# Altium PCB RF Frontend v1.0.PcbDoc
Units mil, origin at the board's own origin, x right, y up, seen from the top; angles counter-clockwise.
Board outline 1975 x 1250 mil, 4 copper layers (Top Layer, Signal Layer 1, Signal Layer 2, Bottom Layer), stack 30.634 mil thick; 54 components, 39 nets, 191 pads, 88 vias.
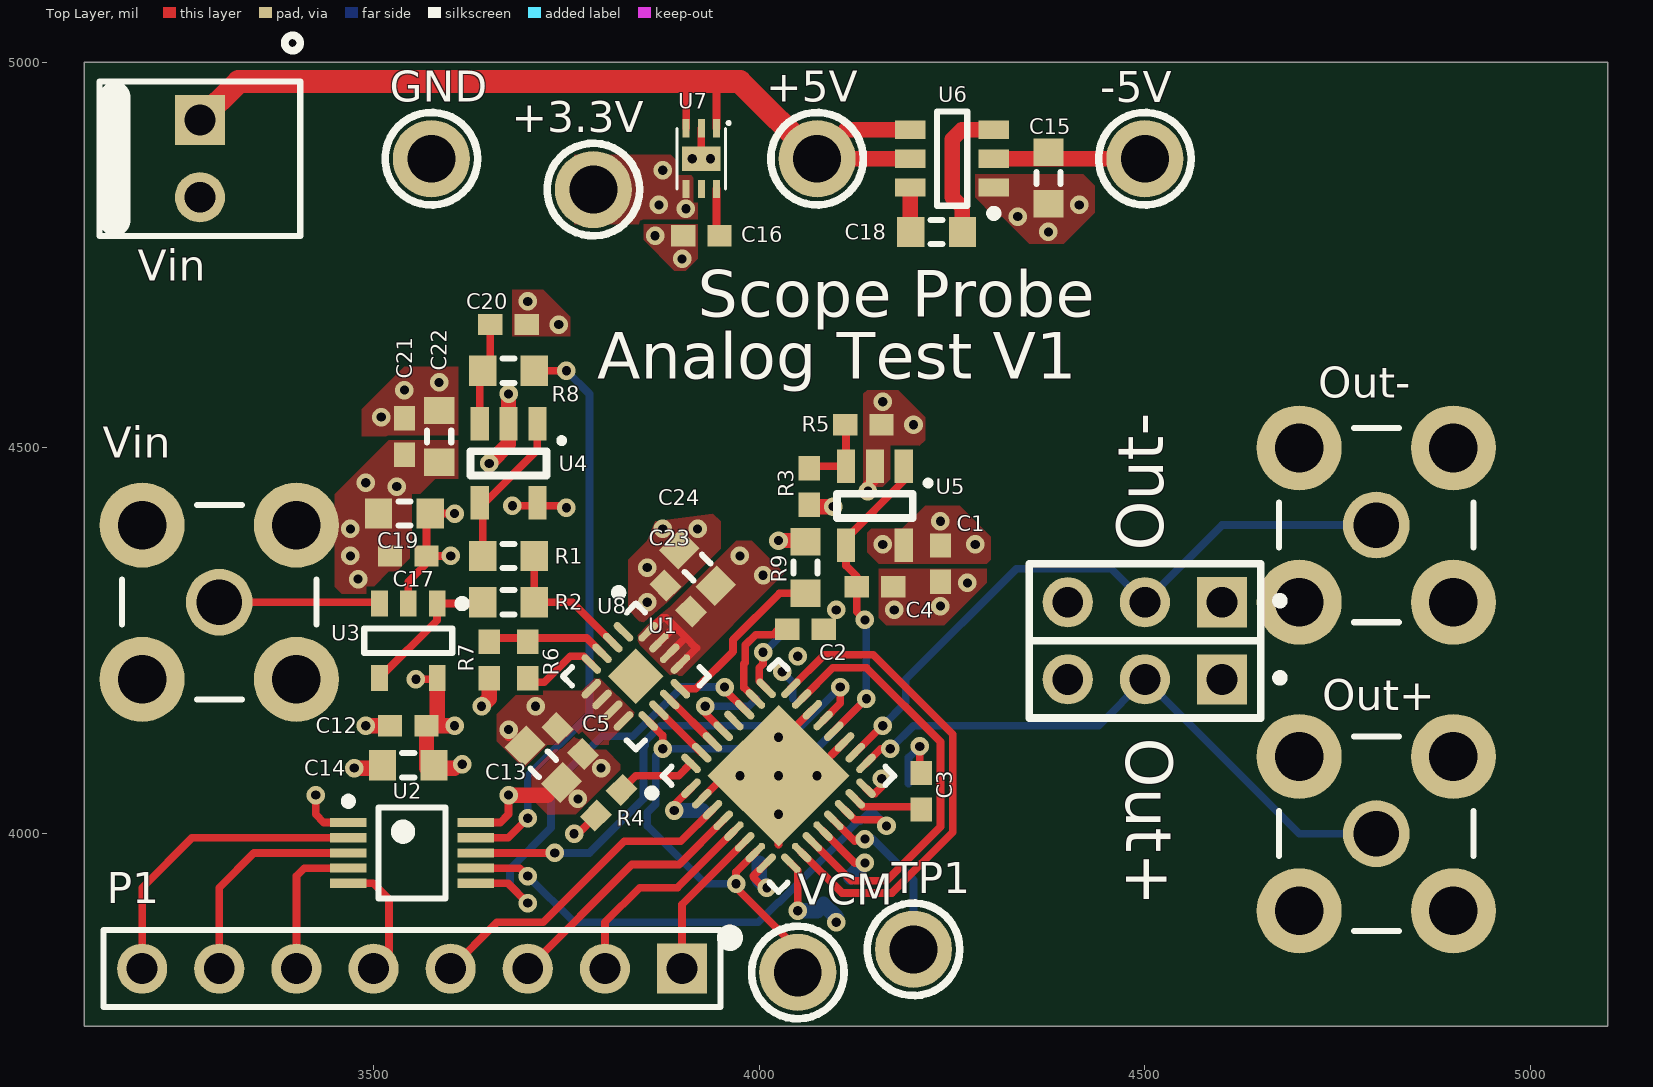
[diagram p0: Top Layer view]
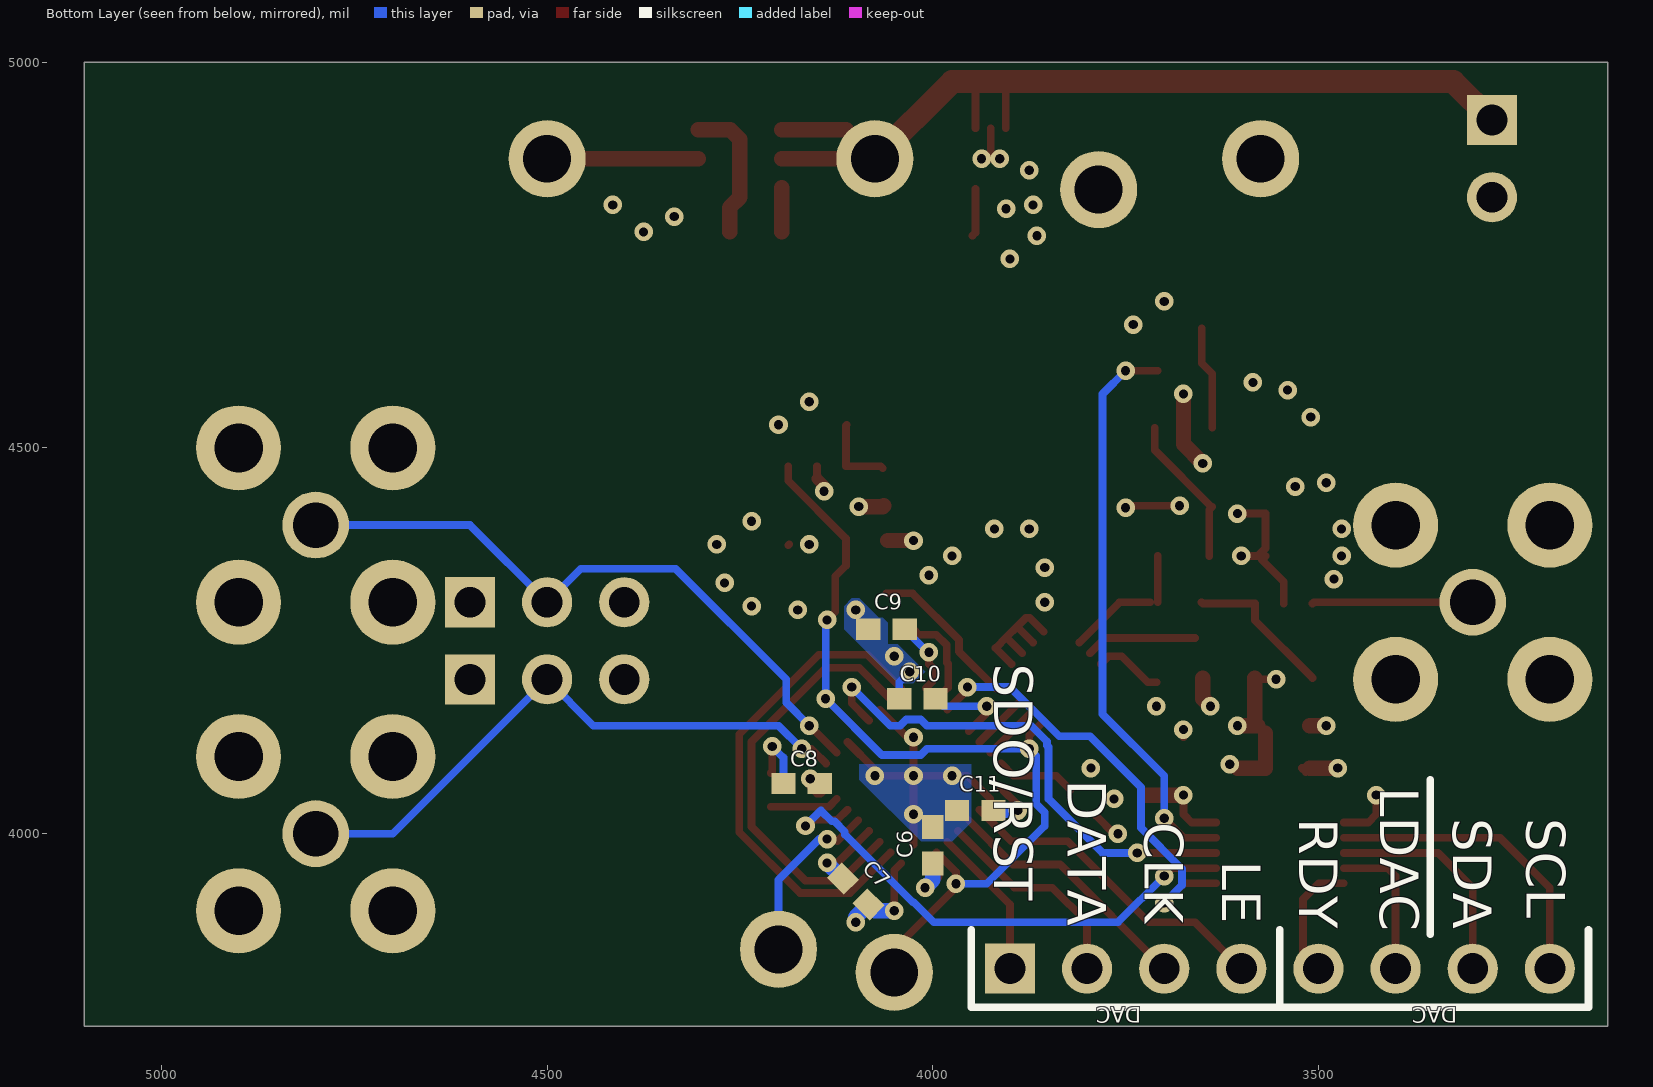
[diagram p1: Bottom Layer view, seen from below]
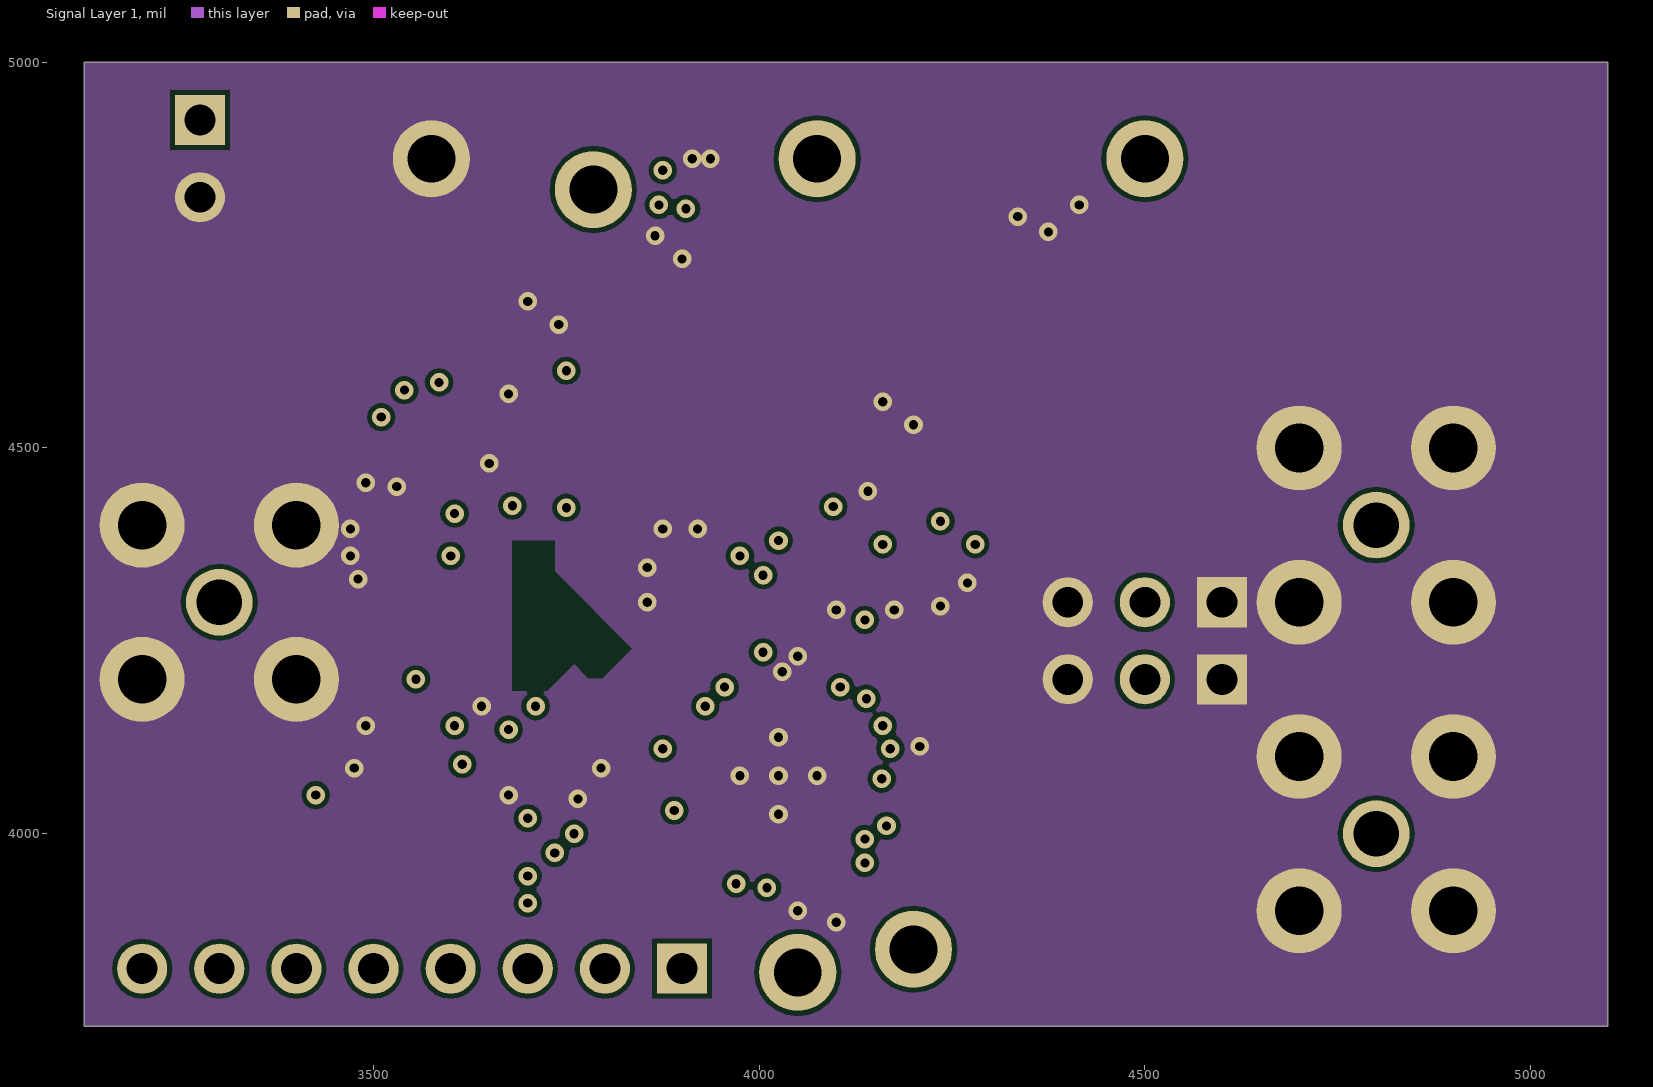
[diagram p2: Signal Layer 1]
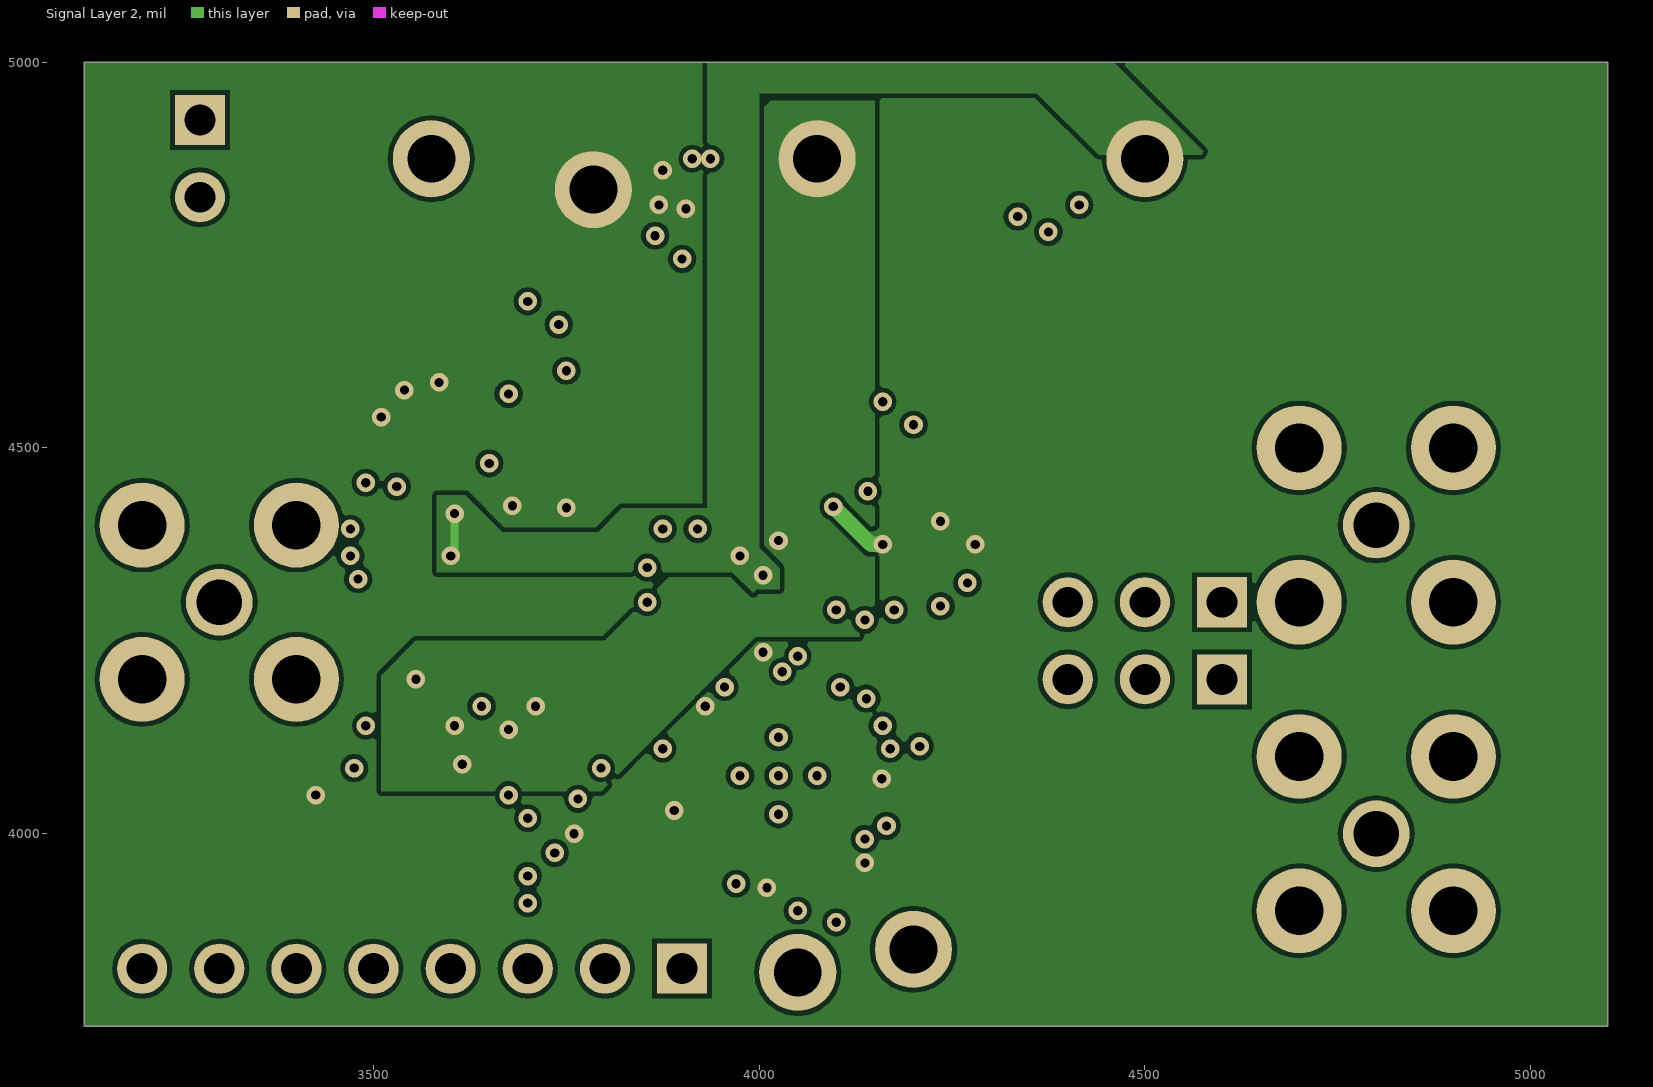
[diagram p3: Signal Layer 2]

## Layer stack, top to bottom
Top Solder: solder mask 0.4, Solder Resist, Dk 3.5
Top Layer: signal copper 1.4
Dielectric 1: core 10, FR-4, Dk 4.2
Signal Layer 1: signal copper 1.417
Dielectric 3: prepreg 5, Dk 4.2
Signal Layer 2: signal copper 1.417
Dielectric 2: core 10, Dk 4.2
Bottom Layer: signal copper 1.4
Bottom Solder: solder mask 0.4, Solder Resist, Dk 3.5

## Board outline
3125,3750 3125,5000 5100,5000 5100,3750

## Design rules (kind name [scope] priority, off if disabled: settings)
Clearance [All] p1: gap=6 ignorepadtopadclearanceinfootprint=FALSE
MinimumSolderMaskSliver [All] p1: minsoldermaskwidth=2
PlaneConnect [All] p1: planeconnectstyle=Direct reliefexpansion=20 reliefentries=4 reliefconductorwidth=10 reliefairgap=10
PolygonConnect [All] p1: connectstyle=Direct reliefconductorwidth=10 reliefentries=4 polygonreliefangle="90 Angle" airgapwidth=10
RoutingVias [All] p1: holewidth=12 width=24 viastyle="Through Hole" minholewidth=12 minwidth=24 maxholewidth=50 maxwidth=100
SolderMaskExpansion [All] p1: expansion=4
Width [All] p1: maxlimit=100 minlimit=6 preferedwidth=6
28 further rules are at their usual default settings.

## Classes and differential pairs
component class "EF Frontend": +3.3V +5V -5V C1 C2 C3 C4 C5 C6 C7 C8 C9 C10 C11 C12 C13 C14 C15 C16 C17 C18 C19 C20 C21 C22 C23 C24 GND Out+ Out- P1 R1 R2 R3 R4 R5 R6 R7 R8 R9 TP1 U1 U2 U3 U4 U5 U6 U7 U8 VCM Vin

## Components (designator, comment, footprint, x,y, rotation, side; value= is the part's Value field where it differs from the comment)
+3.3V "TP" TESTPOINT062 3785,4835 r90 top
+5V "TP" TESTPOINT062 4075,4875 r0 top
-5V "TP" TESTPOINT062 4500,4875 r0 top
C1 "Cap" 0402(1005) 4235,4350 r90 top value=0.1uF
C2 "Cap" 0402(1005) 4060,4265 r180 top value=0.1uF
C3 "Cap" 0402(1005) 4210,4055 r270 top value=0.1uF
C4 "Cap" 0402(1005) 4150,4320 r180 top value=0.1uF
C5 "Cap" 0402(1005) 3755,4120 r135 top value=0.1uF
C6 "Cap" 0402(1005) 4000,3985 r270 bottom value=0.1uF
C7 "Cap" 0402(1005) 4100,3925 r45 bottom value=0.1uF
C8 "Cap" 0402(1005) 4170,4065 r180 bottom value=0.1uF
C9 "Cap" 0402(1005) 4060,4265 r180 bottom value=0.1uF
C10 "Cap" 0402(1005) 4020,4175 r180 bottom value=0.1uF
C11 "Cap" 0402(1005) 3945,4030 r180 bottom value=0.1uF
C12 "Cap" 0402(1005) 3545,4140 r0 top value=0.1uF
C13 "25V" 0603(1608) 3720,4090 r135 top value=10uF
C14 "25V" 0603(1608) 3545,4088.53 r0 top value=10uF
C15 "25V" 0603(1608) 4375,4850 r90 top value=10uF
C16 "Cap" 0402(1005) 3925,4775 r0 top value=0.1uF
C17 "Cap" 0402(1005) 3545,4360 r0 top value=0.1uF
C18 "25V" 0603(1608) 4230,4780 r0 top value=10uF
C19 "25V" 0603(1608) 3540,4415 r0 top value=10uF
C20 "Cap" 0402(1005) 3675,4660 r180 top value=0.1uF
C21 "Cap" 0402(1005) 3540,4515 r90 top value=0.1uF
C22 "25V" 0603(1608) 3585,4515 r90 top value=10uF
C23 "Cap" 0402(1005) 3895,4305 r315 top value=0.1uF
C24 "25V" 0603(1608) 3920,4345 r315 top value=10uF
GND "TP" TESTPOINT062 3575,4875 r0 top
Out+ "SMA" "TE SMA Stright" 4800,4000 r0 top
Out+ "0.1\"" 0.1HDR1X3 4600,4200 r180 top
Out- "SMA" "TE SMA Stright" 4800,4400 r0 top
Out- "0.1\"" 0.1HDR1X3 4600,4300 r180 top
P1 "0.1\" Vert" 0.1HDR1X8 3900,3825 r180 top
R1 "Res1" 0603(1608) 3675,4360 r0 top value=10.0k
R2 "Res1" 0603(1608) 3675,4300 r0 top value=10.0k
R3 "Res1" 0402(1005) 4065,4450 r270 top value=10k
R4 "Res1" 0402(1005) 3805,4040 r45 top value=0
R5 "Res1" 0402(1005) 4135,4530 r180 top value=10k
R6 "Res1" 0402(1005) 3700,4225 r270 top value=10k
R7 "Res1" 0402(1005) 3650,4225 r90 top value=10k
R8 "Res1" 0603(1608) 3675,4600 r180 top value=16.9k
R9 "Res1" 0603(1608) 4060,4345 r270 top value=0.0
TP1 "TP" TESTPOINT062 4200,3850 r0 top
U1 "ADRF6518" QFN50P500X500X80_HS-33L 4025,4075 r45 top
U2 "MCP4728" MSOP-10 3550,3975 r0 top
U3 "AD8055" SOT95P280X145-5L 3545,4250 r270 top
U4 "OPA365" SOT23-5 3675,4480 r270 top
U5 "OPA365" SOT23-5 4150,4425 r270 top
U6 "LM2664" SOT95P280X145-6N 4250,4875 r180 top
U7 "MIC5353" MLF22D-06 3925,4875 r270 top
U8 "ADA4932-1" QFN50P300X300X80_HS-17L 3840.07,4203.85 r315 top
VCM "TP" TESTPOINT062 4050,3820 r0 top
Vin "SMA" "TE SMA Stright" 3300,4300 r0 top
Vin "0.1\"" 0.1HDR1X2P 3275,4926.06 r270 top

## Footprints (in the part's own frame and the unit in brackets; to place one, negate y for a bottom-side part, rotate by r counter-clockwise, add the part's x,y. Pads: shape width x height; smd on the part's side, far side on the other; paste and mask are expansions set on the pad)
0.1HDR1X2P [mil] "Connector; Header; 2 Position; Locking; Polarized"
  rect 65x65 hole 40: 1(1.06,0)
  round 65 hole 40: 2(101.06,0)
  silkscreen extent -109,-130 151,130
0.1HDR1X3 [mil] "0.1\" Spacing Header, 3 Pin"
  rect 65x65 hole 40: 1(0,0)
  round 65 hole 40: 2(100,0) 3(200,0)
  silkscreen extent -80,-50 250,50, body extent -50,-50 250,50, height 400
0.1HDR1X8 [mil] "Connector; Header; 8 Position"
  rect 65x65 hole 40: 1(0,0)
  round 65 hole 40: 2(100,0) 3(200,0) 4(300,0) 5(400,0) 6(500,0) 7(600,0) 8(700,0)
  silkscreen extent -69,-50 750,50, body extent -50,-50 750,50, height 400
0402(1005) [mm] "Chip, Body 1.1x0.5mm, IPC Medium Density"
  rect 0.8x0.7 smd: 1(-0.6,0) 2(0.6,0)
  body extent -0.55,-0.3 0.55,0.3, height 0.4
0603(1608) [mm] "Chip, Body 1.6x0.8mm, IPC Medium Density"
  rect 0.9x1 smd: 1(-0.85,0) 2(0.85,0)
  silkscreen extent -0.2,-0.4 0.2,0.4, body extent -0.85,-0.47 0.85,0.47, height 0.6
MLF22D-06 [mm] "SON 6-Leads, Body 1.6x1.6mm (typ), Pitch 0.50mm"
  rect 0.6x0.23 smd: 1(-1,0.5) 2(-1,0) 3(-1,-0.5) 4(1,-0.5) 5(1,0) 6(1,0.5)
  rect 0.8x1.26 smd: 7(0,0)
  silkscreen extent -1.22,-0.8 1,0.95, body extent -0.98,-0.8 0.98,0.8, height 0.9
MSOP-10 [mm]
  rect 1.2x0.3 smd: 1(-2.1,1) 2(-2.1,0.5) 3(-2.1,0) 4(-2.1,-0.5) 5(-2.1,-1) 6(2.1,-1) 7(2.1,-0.5) 8(2.1,0) 9(2.1,0.5) 10(2.1,1)
  silkscreen extent -2.22,-1.5 1.1,1.82, body extent -2.45,-1.5 2.45,1.5, height 1.1
QFN50P300X300X80_HS-17L [mm] "QFN, 16-Leads, Body 3.00x3.00mm, Pitch 0.50mm, Thermal Pad 1.30x1.30mm, IPC High Density"
  oval 0.813x0.241 smd: 1(-1.325,0.75) 2(-1.325,0.25) 3(-1.325,-0.25) 4(-1.325,-0.75) 9(1.325,-0.75) 10(1.325,-0.25) 11(1.325,0.25) 12(1.325,0.75)
  oval 0.241x0.813 smd: 5(-0.75,-1.325) 6(-0.25,-1.325) 7(0.25,-1.325) 8(0.75,-1.325) 13(0.75,1.325) 14(0.25,1.325) 15(-0.25,1.325) 16(-0.75,1.325)
  rect 1.3x1.3 smd: 17(0,0)
  silkscreen extent -2.47,-1.7 1.7,1.7, body extent -1.57,-1.57 1.57,1.57, height 0.8
QFN50P500X500X80_HS-33L [mm] "QFN, 32-Leads, Body 5.00x5.00mm, Pitch 0.50mm, Thermal Pad 3.30x3.30mm, IPC High Density"
  oval 0.813x0.241 smd: 1(-2.325,1.75) 2(-2.325,1.25) 3(-2.325,0.75) 4(-2.325,0.25) 5(-2.325,-0.25) 6(-2.325,-0.75) 7(-2.325,-1.25) 8(-2.325,-1.75) 17(2.325,-1.75) 18(2.325,-1.25) 19(2.325,-0.75) 20(2.325,-0.25) 21(2.325,0.25) 22(2.325,0.75) 23(2.325,1.25) 24(2.325,1.75)
  oval 0.241x0.813 smd: 9(-1.75,-2.325) 10(-1.25,-2.325) 11(-0.75,-2.325) 12(-0.25,-2.325) 13(0.25,-2.325) 14(0.75,-2.325) 15(1.25,-2.325) 16(1.75,-2.325) 25(1.75,2.325) 26(1.25,2.325) 27(0.75,2.325) 28(0.25,2.325) 29(-0.25,2.325) 30(-0.75,2.325) 31(-1.25,2.325) 32(-1.75,2.325)
  rect 3.3x3.3 smd: 33(0,0)
  silkscreen extent -3.47,-2.7 2.7,2.7, body extent -2.55,-2.55 2.55,2.55, height 0.8
SOT23-5 [mm] "SOT23-5"
  rect 1.1x0.6 smd: 1(-1.3,0.95) 2(-1.3,0) 3(-1.3,-0.95) 4(1.3,-0.95) 5(1.3,0.95)
  silkscreen extent -0.8,-1.25 0.4,1.8, body extent -0.6,-1.15 0.6,1.25, height 0.95
SOT95P280X145-5L [mm] "SOT23, 5-Leads, Body 2.90x2.80mm, Pitch 0.95mm, IPC High Density"
  rect 0.85x0.55 smd: 1(-1.225,0.95) 2(-1.225,0) 3(-1.225,-0.95) 4(1.225,-0.95) 5(1.225,0.95)
  silkscreen extent -1.35,-1.45 0.4,1.9, body extent -1.4,-1.45 1.4,1.45, height 1.45
SOT95P280X145-6N [mm] "SOT23, 6-Leads, Body 2.90x2.80mm, Pitch 0.95mm, IPC Medium Density"
  rect 1x0.6 smd: 1(-1.375,0.95) 2(-1.375,0) 3(-1.375,-0.95) 4(1.375,-0.95) 5(1.375,0) 6(1.375,0.95)
  silkscreen extent -1.5,-1.55 0.5,1.92, body extent -0.88,-1.52 0.88,1.53, height 1.45
"TE SMA Stright" [mm] "Connector; RF Coaxial, MCX, Thru-Hole; 5 Position; Vertical"
  round 2.2 hole 1.5 mask+0.07: 1(0,0)
  round 2.8 hole 1.6: 2(-2.54,-2.54) 2(-2.54,2.54) 2(2.54,-2.54) 2(2.54,2.54)
  silkscreen extent -3.2,-3.2 3.2,3.2, body extent -3.2,-3.2 3.2,3.2, height 7.8
TESTPOINT062 [mil]
  round 100 hole 62: 1(0,0)
  silkscreen extent -60,-60 60,60

## Part data
+3.3V +5V -5V GND TP1 VCM: library part 57, Approved=True, Class=Connector, Date Modified="6/23/2009 1:59:56 PM", Key=57, MANF="Keystone Electronics", MANF_PN=5005, MENG_PN=CON00004, Other="Red, Loop, Thru Hole, 0.22\", 0.063\" Dia", P&V Description="Connector, Test Point, Red, Loop, Thru Hole, 0.22\", 0.063\" Dia", Parent Key=57, SMD=False, Type="Test Point", VENDOR=Digikey, VENDOR_PN=5005K-ND, Verified=True
C1 C2 C3 C4 C5 C6 C7 C8 C9 C10 C11 C12 C16 C17 C20 C21 C23: library part 1603, Max Temperature=85, Package=0402, Tolerance=20, Voltage=16, Approved=False, Class=Capacitor, Date Modified="5/16/2019 9:44:17 PM", Key=1603, MANF="Samsung Electro-Mechanics", MANF_PN=CL05F104ZO5NNNC, MENG_PN=???1603, Modified By=momo, P&V Description="Capacitor, Ceramic, 0.1uF, 16V, 20% Tol, 85C, 0402, SMD", Parent Key=1603, SMD=True, Type=Ceramic, VENDOR=Digikey, VENDOR_PN=1276-1004-1-ND, Verified=False
C13 C14 C15 C18 C19 C22 C24: library part 1306, Max Temperature=85, Package=0603, Tolerance=20, Voltage=25, Approved=True, Class=Capacitor, Date Modified="3/3/2015 11:08:29 AM", Key=1306, MANF="Samsung Electro-Mechanics", MANF_PN=CL10A106MA8NRNC, MENG_PN=???1306, Modified By=sotterbacher, Other=X5R, P&V Description="Capacitor, Ceramic, 10uF, 25V, 20% Tol, 85C, X5R, 0603, SMD", Parent Key=1306, SMD=True, Type=Ceramic, VENDOR=Digikey, VENDOR_PN=1276-1869-1-ND, Verified=True
Out+ Out- Vin: library part 968, Approved=True, Class=Connector, Date Modified="5/28/2013 3:41:34 PM", Key=968, MANF="TE Connectivity", MANF_PN=5-1814832-1, MENG_PN=???968, Modified By=rlaity, Other="Vertical.  50 Ohm.  3 GHz.", P&V Description="Connector, SMA, 1 Positions, Female, Vertical.  50 Ohm.  3 GHz.", Parent Key=968, Positions=1, Sex=Female, SMD=False, Type=SMA, VENDOR=Digikey, VENDOR_PN=A97594-ND, Verified=True
Out+ Out-: library part 1134, Approved=False, Class=Connector, Date Modified="7/21/2017 2:32:53 PM", Key=1134, MANF=Harwin, MANF_PN=M20-9990346, MENG_PN=???1134, Modified By=jrowly, Other="Vertical, Tin Plated", P&V Description="Connector, Header, 0.1\", 3 Positions, Male, 0.1\" Spacing, Vertical, Tin Plated", Parent Key=1134, Positions=3, Sex=Male, SMD=False, Spacing=0.1, Type="Header, 0.1\"", VENDOR=Digikey, VENDOR_PN=952-2264-ND, Verified=False
P1: library part 53, Current=4, Voltage=250, Approved=False, Class=Connector, Date Modified="7/21/2017 2:26:43 PM", Key=53, MANF=Molex, MANF_PN=22-28-4083, MENG_PN=CON00006, Modified By=jrowly, Other="0.24\" Long, 0.125\" Tail, 15u\" Select Gold", P&V Description="Connector, Header, 0.1\", 8 Positions, 0.1\" Spacing, 4A, 250V, 0.24\" Long, 0.125\" Tail, 15u\" Select Gold", Parent Key=53, Positions=8, SMD=False, Spacing=0.1, Type="Header, 0.1\"", VENDOR=Digikey, VENDOR_PN=WM6508-ND, Verified=False
R1 R2: library part 739, Package=0603, Power=0.1, Tolerance=1, Voltage=50, Approved=True, Class=Resistor, Date Modified="7/7/2012 11:51:31 AM", Expr1026=739, Key=739, MANF=Yageo, MANF_PN=RC0603FR-0710KL, MENG_PN=???739, Modified By=pmarcus, P&V Description="Resistor, Thick Film, 10.0k Ohms, 0.1W, 1% Tol, 50V, 0603, SMD", Parent Key=739, SMD=True, Type="Thick Film", VENDOR=Digikey, VENDOR_PN=311-10.0KHRCT-ND, Verified=True
R3 R5 R6 R7: library part 1605, Package=0402, Power=0.063, Tolerance=1, Approved=False, Class=Resistor, Date Modified="5/16/2019 9:57:19 PM", Expr1026=1605, Key=1605, MANF="Stackpole Electronics", MANF_PN=RMCF0402FT10K0, MENG_PN=???1605, Modified By=momo, P&V Description="Resistor, Thick Film, 10k Ohms, 0.063W, 1% Tol, 0402, SMD", Parent Key=1605, SMD=True, Type="Thick Film", VENDOR=Digikey, VENDOR_PN=RMCF0402FT10K0CT-ND, Verified=False
R4: library part 1606, Package=0402, Approved=False, Class=Resistor, Date Modified="5/16/2019 9:59:31 PM", Expr1026=1606, Key=1606, MANF="Stackpole Electronics", MANF_PN=RMCF0402ZT0R00, MENG_PN=???1606, Modified By=momo, P&V Description="Resistor, Thick Film, 0 Ohms, 0402, SMD", Parent Key=1606, SMD=True, Type="Thick Film", VENDOR=Digikey, VENDOR_PN=RMCF0402ZT0R00CT-ND, Verified=False
R8: library part 1011, Package=0603, Power=0.1, Tolerance=1, Approved=True, Class=Resistor, Date Modified="8/12/2013 4:27:29 PM", Expr1026=1011, Key=1011, MANF=Panasonic, MANF_PN=ERJ-3EKF1692V, MENG_PN=???1011, Modified By=sotterbacher, P&V Description="Resistor, Thick Film, 16.9k Ohms, 0.1W, 1% Tol, 0603, SMD", Parent Key=1011, SMD=True, Type="Thick Film", VENDOR=Digikey, VENDOR_PN=P16.9KHCT-ND, Verified=True
R9: library part 742, Package=0603, Power=0.1, Voltage=75, Approved=True, Class=Resistor, Date Modified="3/18/2015 2:54:24 PM", Expr1026=742, Key=742, MANF=Rohm, MANF_PN=MCR03ERTJ000, MENG_PN=???742, Modified By=pmarcus, Other="20m Ohm Max", P&V Description="Resistor, Thick Film, 0.0 Ohms, 0.1W, 75V, 20m Ohm Max, 0603, SMD", Parent Key=742, SMD=True, Type="Thick Film", VENDOR=Digikey, VENDOR_PN=RHM0.0CGCT-ND, Verified=True
U1: library part 1600, Package=QFN-32, Approved=False, Class=IC, Date Modified="5/16/2019 5:57:00 PM", Key=1600, MANF="Analog Devices", MANF_PN=ADRF6518ACPZ-R7, MENG_PN=???1600, Modified By=momo, Other="VGA , 0Hz ~ 1.1GHz", P&V Description="IC, VGA, VGA , 0Hz ~ 1.1GHz, QFN-32, SMD", Parent Key=1600, SMD=True, Type=VGA, VENDOR=Digikey, VENDOR_PN=ADRF6518ACPZ-R7CT-ND, Verified=False
U2: library part 1601, Package=MSOP-10, Approved=False, Class=IC, Date Modified="5/16/2019 7:43:15 PM", Key=1601, MANF=Microchip, MANF_PN=MCP4728T-E/UN, MENG_PN=???1601, Modified By=momo, Other="12 Bit, 4 Channel", P&V Description="IC, DAC, 12 Bit, 4 Channel, MSOP-10, SMD", Parent Key=1601, SMD=True, Type=DAC, VENDOR=Digikey, VENDOR_PN=MCP4728T-E/UNCT-ND, Verified=False
U3: library part 1599, Package=SOT-23-5, Approved=False, Class=IC, Date Modified="5/15/2019 9:24:30 PM", Key=1599, MANF="Analog Devices", MANF_PN=AD8055ARTZ-REEL7, MENG_PN=???1599, Modified By=momo, Other="300MHz, 1400V/µs", P&V Description="IC, Op Amp, 300MHz, 1400V/µs, SOT-23-5, SMD", Parent Key=1599, SMD=True, Type="Op Amp", VENDOR=Digikey, VENDOR_PN=AD8055ARTZ-REEL7CT-ND, Verified=False
U4 U5: library part 994, Package=SOT-23-5, Approved=True, Class=IC, Date Modified="7/11/2013 12:18:41 PM", Key=994, MANF="Texas Instruments", MANF_PN=OPA365AIDBVR, MENG_PN=???994, Modified By=pmarcus, Other="IC OPAMP GP R-R 50MHZ SOT23-5", P&V Description="IC, Op Amp, IC OPAMP GP R-R 50MHZ SOT23-5, SOT-23-5, SMD", Parent Key=994, SMD=True, Type="Op Amp", VENDOR=Digikey, VENDOR_PN=296-20645-1-ND, Verified=True
U6: library part 1602, Package=SOT-23-5, Approved=False, Class=IC, Date Modified="5/16/2019 9:05:02 PM", Key=1602, MANF="Texas Instruments", MANF_PN=LM2664M6X/NOPB, MENG_PN=???1602, Modified By=momo, Other="Charge Pump, Inverting", P&V Description="IC, Voltage Regulator, Charge Pump, Inverting, SOT-23-5, SMD", Parent Key=1602, SMD=True, Type="Voltage Regulator", VENDOR=Digikey, VENDOR_PN=LM2664M6X/NOPBCT-ND, Verified=False
U7: library part 1419, Package=DFN-6, Supplier Part Number 1=576-3680-1-ND, Approved=True, Class=IC, Date Modified="3/7/2016 8:56:01 AM", Key=1419, MANF=Microchip, MANF_PN=MIC5353-3.3YMT-TR, MENG_PN=???1419, Modified By=rlaity, Other="ULDO, Low Noise, 500mA, 2.6-6Vin,", P&V Description="IC, Voltage Regulator, ULDO, Low Noise, 500mA, 2.6-6Vin,, DFN-6, SMD", Parent Key=1419, SMD=True, Supplier 1=Digi-Key, Type="Voltage Regulator", VENDOR=Digikey, VENDOR_PN=576-3680-1-ND, Verified=True
U8: library part 1597, Package=QFN-16, Approved=False, Class=IC, Date Modified="5/26/2019 11:36:30 AM", Key=1597, MANF="Analog Devices", MANF_PN=ADA4932-1YCPZ-R7, MENG_PN=???1597, Modified By=momo, Other="Differential Amplifier, 3-11V, 2800V/µs, 560MHz", P&V Description="IC, Op Amp, Differential Amplifier, 3-11V, 2800V/µs, 560MHz, QFN-16, SMD", Parent Key=1597, SMD=True, Type="Op Amp", VENDOR=Digikey, VENDOR_PN=ADA4932-1YCPZ-R7CT-ND, Verified=False
Vin: library part 375, Current=4, Voltage=250, Approved=False, Class=Connector, Date Modified="7/21/2017 2:28:28 PM", Key=375, MANF=Molex, MANF_PN=22-11-2022, MENG_PN=CON00068, Modified By=jrowly, Other="0.24\" Long, 0.125\" Tail, 15u Select Gold, Polarized, Locking Ramp", P&V Description="Connector, Header, 0.1\", 2 Positions, Male, 0.1\" Spacing, 4A, 250V, 0.24\" Long, 0.125\" Tail, 15u Select Gold, Polarized, Locking Ramp", Parent Key=375, Positions=2, Sex=Male, SMD=False, Spacing=0.1, Type="Header, 0.1\"", VENDOR=Digikey, VENDOR_PN=WM2700-ND, Verified=False

## Via types
v1: diameter 24, hole 12, Top Layer to Bottom Layer, tented both sides, 86 vias
v2: diameter 24, hole 12, Top Layer to Bottom Layer, tented top, 2 vias

## Nets (pads, with @x,y where several pads share a name; then routed paths per layer and width w, separated by ;. In a path a pad name is that pad's centre, name@x,y a point inside that pad or via, vN(x,y) a via of type N, cw(c..) or ccw(c..) an arc to the next point about the centre after c; other vN are vias at no path point)
3V3: +3.3V.1 C1.2 C6.2 C7.2 C8.2 C9.2 C10.2 C11.2 C21.2 C22.2 R3.2 R4.1 U1.1 U1.8 U1.12 U1.16 U1.25 U1.29 U2.1 U4.5 U5.5 U7.4 | length 838.7
  Top Layer w10: v1(3425,4050) 3425,4025 3435.63,4014.37 U2.1 ; v1(3680,4425) 3747.64,4425 v1(3750,4422.64) ; v1(3760,4000) 3765,4000 R4.1 ; +3.3V.1 3815,4835 +3.3V.1@3814.37,4835.63 ; v1(3890,4030) 3890,4037.44 U1.1 ; v1(3930,4165) 3930,4156.08 U1.29 ; v1(4005,4235) 4005,4220 4000,4215 4000,4197.44 U1.25 ; U1.8 3992.48,3945.05 3993,3944.53 3993,3943 4006,3930 v1(4010,3930) ; R3.2@4063.62,4425 R3.2 ; U1.12 4124.08,3962 v1(4137,3962) ; U1.16 4145.44,4052 4150,4052 4159,4061 v1(4159,4071) ; U5.5@4186.22,4375 U5.5 ; v1@4278.62,4373.62 v1(4280,4375)
  Top Layer w20: R3.2@4063.62,4425 4064.62,4424 v1(4096,4424)
  Signal Layer 2 w20: v1(4096,4424) 4145,4375 v1(4160,4375)
  Bottom Layer w10: v1(3930,4165) 3986.38,4165 C10.2 ; v1(4005,4235) 4006.38,4235 C9.2 ; C7.2@4115,3943.62 C7.2@4118.62,3943.62
  Bottom Layer w20: v1(3890,4030) C11.2@3926.38,4030 ; C6.2 4000,3940 v1(4010,3930) ; C7.2@4118.62,3943.62 v1(4137,3962)
  other v1: 4235,4405 3510,4540 3540,4575 3585,4585 3905,4810 3870,4815 3875,4860
5V: +5V.1 C5.2 C12.2 C13.2 C14.2 R9.1 U3.5 U6.4 U6.5 U7.1 U7.3 U8.5 U8.6 U8.7 U8.8 Vin.1@3275,4925 | length 1516.3
  Top Layer w10: v1(3555,4200) 3580.63,4200 U3.5 ; C12.2@3568.62,4130.16 3578.46,4140 C12.2@3582.4,4143.94 ; v1@3605,4085 3610,4085 v1(3615,4090) ; v1@3675,4125 v1(3675,4135) ; 3900,4975 3905.32,4969.69 U7.3 ; U7.1 3944.68,4969.69 3950,4975 ; R9.1@4058.46,4380 R9.1
  Top Layer w20: C12.2@3568.62,4130.16 3568.62,4085 v1@3605,4085 ; C12.2@3578.46,4140 v1(3605,4140) ; C12.2@3582.4,4143.94 U3.5 ; v1(4025,4380) R9.1@4058.46,4380 ; U6.5 +5V.1 4112.4,4912.4 U6.4
  Top Layer w30: Vin.1@3275,4925 3325,4975 3900,4975 3950,4975 3975,4975 +5V.1
  other v1: 3710,4165
-5V: -5V.1 C15.2 C17.2 C19.2 C23.2 C24.2 U3.2 U6.2 U8.13 U8.14 U8.15 U8.16 | length 630.6
  Top Layer w10: U3.2 3545,4326.54 3573.54,4355.08 C17.2 C17.2@3578.46,4360 ; v1(3600,4360) C17.2@3578.46,4360 ; v1(3605,4415) 3568.62,4415 3568.62,4369.84 C17.2@3578.46,4360 ; U8.16 3874.47,4280 3879.18,4280 3890,4269.18 ; U8.15 3890,4267.69 3890,4269.18 ; U8.14 3904.18,4254.03 3904.18,4255 ; U8.13 3918.58,4240.6 3904.18,4255 ; 3890,4269.18 3904.18,4255
  Top Layer w20: U6.2 -5V.1
  Signal Layer 2 w10: v1(3600,4360) 3605,4365 v1(3605,4415)
  other v1: 4005,4335 3975,4360
CLK\: P1.3 U1.4 | length 332.9
  Top Layer w10: P1.3 3835,3960 3896.08,3960 U1.4
DATA: P1.2 U1.5 | length 276.2
  Top Layer w10: P1.2 3800,3885 3845,3930 3893.92,3930 U1.5
GND: C1.1 C2.1 C3.1 C4.1 C5.1 C6.1 C7.1 C8.1 C9.1 C10.1 C11.1 C12.1 C13.1 C14.1 C15.1 C16.1 C17.1 C19.1 C20.1 C21.1 C22.1 C23.1 C24.1 GND.1 Out+.1@4600,4200 Out+.2@4700,3900 Out+.2@4700,4100 Out+.2@4900,3900 Out+.2@4900,4100 Out+.3 Out-.1@4600,4300 Out-.2@4700,4300 Out-.2@4700,4500 Out-.2@4900,4300 Out-.2@4900,4500 Out-.3 R5.1 R7.1 U1.2 U1.9 U1.19 U1.22 U1.33 U2.10 U4.2 U5.2 U6.1 U7.2 U7.7 Vin.2 | length 1083.8
  Top Layer w10: C14.1@3516.38,4080 C14.1@3521.38,4085 ; U2.10 3664.37,4014.37 3675,4025 v1(3675,4050) ; U7.7 U7.2 ; U1.2 3955.4,4075 v1(3975,4075) v1(4025,4075) ; U1.33@4025,3986 v1(4025,4025) v1(4025,4075) ; U1.9 4050,3952.56 v1(4050,3900) ; U1.22 4033.24,4125 v1(4025,4125) v1(4025,4075) ; U1.19 4075,4083.24 v1(4075,4075) v1(4025,4075) ; U5.2@4150,4460 U5.2 ; v1(4208,4113) 4208,4080.62 C3.1
  Top Layer w15: v1(4141,4444) 4141,4449 4140,4450 U5.2@4150,4460
  Top Layer w20: v1(3475,4085) C14.1@3511.38,4085 ; v1(3490,4140) C12.1@3511.54,4140 ; v1(3640,4165) 3650,4175 R7.1 ; v1(3650,4480) 3675,4505 U4.2 v1(3675,4570) ; v1(3675,4050) 3725,4050
  Bottom Layer w10: v1(4030,4210) 4043.62,4196.38 C10.1 ; C8.1 4193.62,4098.62 v1(4208,4113)
  Bottom Layer w20: v1(4050,3900) 4075,3900 C7.1 4100,3891.59 v1(4100,3885)
  other v1: 3765,4045 3795,4085 4050,4230 4100,4290 4175,4290 4235,4295 3855,4300 4270,4325 3480,4330 3855,4345 3470,4360 3470,4395 3875,4395 3920,4395 3530,4450 3490,4455 4200,4530 4160,4560 3740,4660 3700,4690 3900,4745 3865,4775 4375,4780 4335,4800 4415,4815
  other v2: 3913.19,4875 3936.81,4875
L\D\A\C\: P1.6 U2.4 | length 191.6
  Top Layer w10: P1.6 3400,3945 3410.32,3955.32 U2.4
LE: P1.4 U1.3 | length 424.8
  Top Layer w10: P1.4 3660,3885 3720,3885 3825,3990 3898.24,3990 U1.3
NetC2_2: C2.2 U1.26 | length 128.6
  Top Layer w10: U1.26 3980,4189.6 3980,4220 3982,4222 3982,4244.53 3995.47,4258 4018,4258 C2.2@4025,4265
NetC3_2: C3.2 U1.15 | length 89.6
  Top Layer w10: U1.15 4134.6,4035 C3.2@4210,4035
NetC16_2: C16.2 U7.6 | length 62.3
  Top Layer w10: U7.6 3944.68,4778.94 C16.2
NetC18_1: C18.1 U6.6 | length 57.6
  Top Layer w20: C18.1@4195.87,4780 U6.6
NetC18_2: C18.2 U6.3 | length 184.8
  Top Layer w20: C18.2 4263.46,4811.54 4250,4825 4250,4900 4262.4,4912.4 U6.3
NetC20_2: C20.2 R8.2 U4.3 | length 134.5
  Top Layer w10: U4.3@3637.6,4526.18 U4.3 3637.6,4596.06 R8.2 3651.38,4609.84 C20.2@3651.38,4655
NetOut+_1: Out+.1@4800,4000 Out+.2@4500,4200 U1.17 | length 789.5
  Top Layer w10: U1.17 4153.72,4106.28 4157.44,4110 v1(4170,4110)
  Bottom Layer w10: v1(4170,4110) 4200,4140 4440,4140 4500,4200 4700,4000 Out+.1@4800,4000
NetOut-_1: Out-.1@4800,4400 Out-.2@4500,4300 U1.18 | length 851.3
  Top Layer w10: U1.18 4159.6,4140 v1(4160,4140)
  Bottom Layer w10: v1(4160,4140) 4190,4170 4190,4200 4333.5,4343.5 4456.5,4343.5 4500,4300 4600,4400 Out-.1@4800,4400
NetR1_1: R1.1 U4.1 U4.4 | length 199.5
  Top Layer w10: R1.1 3641.54,4419.88 3637.6,4423.82 3638.82,4423.82 3712.4,4497.4 U4.1@3712.4,4526.18
NetR1_2: R1.2 R2.2 U8.2 | length 173.3
  Top Layer w10: R2.2 R1.2 ; R2.2@3718.46,4300 3757.84,4300 U8.2
NetR2_1: R2.1 U3.1 U3.4 | length 197.3
  Top Layer w10: U3.4 3582.4,4276.57 U3.1 3649.76,4298.23 R2.1@3651.54,4300
NetR3_1: R3.1 R5.2 U5.3 | length 103
  Top Layer w10: R3.1 4067.56,4476.18 U5.3 4112.6,4528.78 R5.2
NetR4_2: R4.2 U1.32 | length 104.1
  Top Layer w10: R4.2 3840,4075 3895.55,4075 U1.32
NetR6_1: R6.1 R7.2 U8.3 | length 144.4
  Top Layer w10: R7.2@3660,4253.62 3776.38,4253.62 U8.3
NetR6_2: R6.2 U8.4 | length 90.4
  Top Layer w10: R6.2@3710,4196.38 3721.38,4196.38 3755,4230 3772.16,4230 U8.4
NetR8_1: R8.1 U2.9 | length 744.9
  Top Layer w10: U2.9 3674.69,3994.69 v1(3700,4020) ; R8.1 v1(3750,4600)
  Bottom Layer w10: v1(3700,4020) 3700,4075 3780,4155 3780,4570 v1(3750,4600)
NetR9_2: R9.2 U8.12 | length 222.3
  Top Layer w10: U8.12 3917.84,4187.84 3966,4236 3966,4251.15 4026.38,4311.54 R9.2
NetTP1_1: TP1.1 U1.13 | length 227.8
  Top Layer w10: U1.13 4123.92,3990 4126.92,3993 v1(4137,3993)
  Bottom Layer w10: v1(4137,3993) 4147,3993 4200,3940 TP1.1
NetU1_10: U1.10 U1.24 | length 648.2
  Top Layer w10: U1.24 4084.56,4232 4148,4232 4251,4129 4251,4002 4172,3923 4107.4,3923 U1.10
NetU1_11: U1.11 U1.23 | length 562.6
  Top Layer w10: U1.23 4095.4,4215 4139,4215 4235,4119 4235,4009 4165,3939 4119.24,3939 U1.11
NetU1_14: U1.14 U2.7 | length 695
  Top Layer w10: U2.7 3689.68,3955.32 v1(3700,3945) ; U1.14 4123.76,4018 4157,4018 v1(4165,4010)
  Bottom Layer w10: v1(3700,3945) 3760,3885 3998.73,3885 4024.73,3911 4026,3911 4114,3999 4114,4002.53 4127.47,4016 4131,4016 4145,4030 v1(4165,4010)
NetU1_21: U1.21 U2.8 | length 663
  Top Layer w10: U2.8 v1(3735,3975) ; U1.21 4105,4168.92 v1(4105,4190)
  Bottom Layer w10: v1(3735,3975) 3780,3975 3850,4045 3850,4112.37 3852,4114.37 3852,4119.53 3872.47,4140 4007.47,4140 4015.47,4148 4034.53,4148 4042.53,4140 4055,4140 v1(4105,4190)
NetU1_27: U1.27 U2.6 | length 578.5
  Top Layer w10: U2.6 3674.37,3935.63 v1(3700,3910) ; v1(3955,4190) 3955,4186.76 U1.27
  Bottom Layer w10: v1(3700,3910) 3677,3933 3677,3954.53 3730,4007.53 3730,4060 3796.15,4126.15 3836,4126.15 3899.85,4190 v1(3955,4190)
NetU1_30: U1.30 U8.11 | length 77.7
  Top Layer w10: U8.11@3884.46,4173.78 U1.30
NetU1_31: U1.31 U8.10 | length 78.3
  Top Layer w10: U8.10 3925.07,4104.93 U1.31
NetU3_3: U3.3 Vin.1@3300,4300 | length 208.3
  Top Layer w10: Vin.1@3300,4300 3505.83,4300 U3.3
RDY: P1.5 U2.5 | length 159.5
  Top Layer w10: U2.5 3499.37,3935.63 3520,3915 3520,3845 P1.5
SCL: P1.8 U2.2 | length 399.1
  Top Layer w10: P1.8 3200,3930 3264.69,3994.69 U2.2
SDA: P1.7 U2.3 | length 291
  Top Layer w10: P1.7 3300,3930 3345,3975 U2.3
SDO/RST: P1.1 U1.6 | length 198
  Top Layer w10: P1.1 3900,3908.24 U1.6
VCM: C4.2 U1.7 U1.20 U5.1 U5.4 U8.9 VCM.1 | length 1170.8
  Top Layer w10: U8.9 3875,4127.16 v1(3875,4110) ; v1@3970,3930 VCM.1@4050,3850 ; v1(3970,3935) 3970,3950.4 U1.7 ; U1.20 v1(4138.92,4175) ; v1(4137.01,4277.01) 4126.38,4287.64 C4.2 4126.38,4333.62 4112.6,4347.4 U5.4 4112.6,4382.6 4187.4,4457.4 U5.1
  Signal Layer 1 w10: v1@3970,3930 v1(3970,3935)
  Bottom Layer w10: v1@3970,3930 v1(3970,3935) 3930,3935 3855,4010 3855,4027.37 3866,4038.37 3866,4101 v1(3875,4110) 4007.47,4110 4015.47,4102 4065.92,4102 v1(4138.92,4175) v1@4138.92,4276.08
pads on no net: U1.28 U7.5 U8.1 U8.17

## Polygon pours and split planes (outlines as drawn)
GND on Top Layer "GND" (solid, pour order 20): 3845,4275 3830,4290 3830,4355 3855,4380 3865,4405 3940,4415 3950,4405 3950,4360 3945,4360 3850,4265
3V3 on Top Layer "3V3_L01_P042" (solid, pour order 42): 3610,4605 3540,4605 3485,4550 3485,4515 3605,4515 3610,4510
GND on Top Layer "GND" (solid, pour order 38): 4280,4855 4420,4855 4435,4840 4435,4805 4395,4765 4350,4765 4315,4800 4305,4800 4280,4825
3V3 on Top Layer "GND" (solid, pour order 36): 3920,4845 3920,4790 3760,4790 3760,4880 3885,4880
GND on Top Layer "GND" (solid, pour order 34): 3920,4790 3920,4745 3905,4730 3890,4730 3850,4770 3850,4790
GND on Top Layer "GND" (solid, pour order 16): 3765,4140 3770,4140 3820,4090 3820,4075 3770,4025 3725,4025 3705,4045 3705,4080
5V on Top Layer "5V" (solid, pour order 14): 3695,4085 3725,4115 3740,4115 3760,4135 3780,4115 3805,4115 3805,4120 3840,4155 3790,4205 3770,4185 3690,4185 3660,4155 3660,4120
GND on Top Layer "GND" (solid, pour order 26): 4155,4350 4295,4350 4295,4325 4240,4270 4165,4270 4155,4280
GND on Top Layer "GND" (solid, pour order 24): 4135,4450 4135,4570 4140,4575 4180,4575 4215,4540 4215,4510 4205,4500 4175,4500 4175,4465 4160,4450
3V3 on Top Layer "3V3" (solid, pour order 22): 4155,4350 4140,4365 4140,4390 4145,4395 4185,4395 4215,4425 4260,4425 4300,4385 4300,4355 4295,4350
-5V on Top Layer "-5V" (solid, pour order 18): 3840,4255 3845,4245 3885,4205 3900,4205 4032.5,4337.5 3990,4380 3970,4380 3885,4295 3855,4270
GND on Top Layer "GND" (solid, pour order 12): 3680,4645 3680,4705 3720,4705 3755,4670 3755,4645
GND on Top Layer "GND" (solid, pour order 10): 3530,4340 3520,4340 3490,4310 3460,4310 3450,4320 3450,4440 3520,4510 3610,4510 3610,4460 3580,4460 3550,4430 3550,4360
GND on Bottom Layer "GND" (solid, pour order 32): 4025,4195 4045,4195 4115,4265 4115,4295 4105,4305 4095,4305 4070,4280 4065,4280 4055,4270 4055,4250 4050,4250 4010,4210
GND on Bottom Layer "GND" (solid, pour order 30): 3950,4015 3950,4090 4095,4090 4095,4070 4015,3990 3975,3990
3V3 on Signal Layer 2 "3V3_L03_P040" (solid, pour order 40): 3125,3750 3125,5000 5100,5000 5100,3750
5V on Signal Layer 2 "5V_L03_P028" (solid, pour order 28): 3970,4255 3970,4905 4015,4950 4150,4950 4150,4255
5V on Signal Layer 2 "5V_L03_P006" (solid, pour order 6): 3795,4055 4120,4380 4050,4450 4000,4450 3800,4250 3555,4250 3510,4205 3510,4055
-5V on Signal Layer 2 "-5V_L03_P004" (solid, pour order 4): 3581,4439 3582,4438 3582,4339 3965,4339 3992,4312 3996.65,4316.65 4026.65,4316.65 4026.65,4344.35 3949,4422 3822,4422 3791,4391 3667,4391 3619,4439
-5V on Signal Layer 2 "-5V_L03_P002" (solid, pour order 2): 3932.98,4407.98 3932.86,4408.1 3932.86,4999 4000.85,4999 4000,4998.15 4000,4360
-5V on Signal Layer 2 "-5V_L03_P000" (solid, pour order 0): 3980.01,4999 4461,4999 4580,4880 4440,4880 4360,4960 3980.36,4960
GND on Signal Layer 1 "GND" (solid, pour order 8): 5100,3750 3125,3750 3125,5000 5100,5000

## Other copper
Top Layer:
  text ".Layer_Name" at 8750,5180 h100
Signal Layer 1:
  pour cut-out: 3680,4380 3680,4185 3725,4185 3760,4220 3778.43,4201.57 3796.57,4201.57 3835,4240 3735,4340 3735,4380
  text ".Layer_Name" at 8750,5000 h100
Signal Layer 2:
  text ".Layer_Name" at 8750,4820 h100
Bottom Layer:
  text ".Layer_Name" at 8750,4640 h100

## Silkscreen, mask and mechanical layers (free items; w line width, h text height)
Top Overlay:
  text ".Layer_Name" at 8750,5540 h100
  text "Scope Probe" at 3920,4670 h60
  text "Analog Test V1" at 3790,4590 h60
Bottom Overlay:
  lines w10: 3150,3875 3150,3775 3550,3775 ; 3355,3870 3355,4070 ; 3550,3875 3550,3775 ; 3950,3875 3950,3775 3550,3775
  text ".Layer_Name" at 8750,4280 h100
  text "SDO/RST" at 3920,4220 h50 r90
  text "DATA" at 3825,4070 h50 r90
  text "LDAC" at 3420,4060 h50 r90
  text "SCL" at 3230,4020 h50 r90
  text "SDA" at 3325,4020 h50 r90
  text "RDY" at 3525,4020 h50 r90
  text "CLK" at 3725,4015 h50 r90
  text "LE" at 3625,3965 h50 r90
  text "DAC" at 3320,3775 h20 r180
  text "DAC" at 3730,3775 h20 r180
Top Paste:
  text ".Layer_Name" at 8750,5720 h100
Bottom Paste:
  text ".Layer_Name" at 8750,4100 h100
Top Solder:
  text ".Layer_Name" at 8750,5360 h100
Bottom Solder:
  text ".Layer_Name" at 8750,4460 h100
Board Outline:
  the board outline again, w10
  text ".Layer_Name" at 8750,3920 h100
Notes:
  text "Notes:" at 8865,7780 h60
  text "1. Base material is 0.062 thick FR4" at 8865,7690 h60
  text "2. Foils to finish at 1oz" at 8865,7605 h60
  text "3. All hole sizes are after plating" at 8865,7525 h60
  text "4. Soldermask with L.P.I, Color is Green" at 8865,7440 h60
  text "5. Soldercoat after soldermask" at 8865,7350 h60
  text "6. Silkscreen with white epoxy" at 8865,7260 h60
  text "7. Holes with zero diameter pads are unplated" at 8865,7165 h60
Title Block:
  lines w5: 1000,3125 1200,3125 ; 1000,5250 1200,5250 ; 1000,7375 1200,7375 ; 3750,1000 3750,1200 ; 3750,9300 3750,9500 ; 5075,1200 5075,1300 ; 6500,1000 6500,1200 ; 6500,9300 6500,9500 ; 7300,1600 11800,1600 ; 7300,1900 11800,1900 ; 7300,2200 8800,2200 ; 8800,1300 8800,1900 8800,2500 ; 9250,1000 9250,1200 ; 9250,9300 9250,9500 ; 10900,1300 10900,1900 ; 11800,3125 12000,3125 ; 11800,5250 12000,5250 ; 11800,7375 12000,7375 ; 5075,1300 5075,2500 7300,2500 ; 5075,1300 7300,1300 ; 7300,1300 7300,2500 ; 7300,1300 11800,1300 11800,2500 8800,2500 ; 7300,2500 8800,2500 ; 1000,1000 1000,9500 12000,9500 12000,1000 1000,1000 ; 1200,1200 11800,1200 11800,9300 1200,9300 1200,1200
  text "1" at 2351.34,9365 h70
  text "2" at 5102,9365 h70
  text "3" at 7847,9365 h70
  text "4" at 10598.01,9365 h70
  text "A" at 1075,8347 h70
  text "A" at 11875,8347 h70
  text "B" at 1075,6222 h70
  text "B" at 11875,6222 h70
  text "C" at 1075,4097 h70
  text "C" at 11875,4097 h70
  text "ENGINEER:" at 7350,2400 h45
  text "TITLE:" at 8850,2400 h45
  text "M. Omo" at 7400,2280 h70
  text "PCB DESIGNER:" at 7350,2105 h45
  text "M. Omo" at 7400,1980 h70
  text "D" at 1075,1977 h70
  text "D" at 11875,1977 h70
  text "Probe-Scope Analog   Frontend Test" at 8900,1925 h140
  text "DATE:" at 7350,1800 h45
  text "PART NO.:" at 8850,1800 h45
  text "REV:" at 10950,1800 h45
  text "a" at 5540,1700 h787.4
  text ".PRINT_DATE" at 7400,1680 h70
  text ".revision" at 11000,1680 h70
  text "ASP0010" at 8875,1675 h70
  text "Unified USB Oscilloscope Probe" at 5150,1525 h70
  text "SHEET SIZE:" at 7350,1500 h45
  text "DWG NO:" at 8850,1500 h45
  text "SCALE:" at 10950,1500 h45
  text "Copyright 2019 M. Omo, J. Rowley, K. Hall" at 5143,1394.67 h70
  text "NONE" at 11000,1380 h70
  text "LETTER" at 7375,1375 h70
  text "CAD0010" at 8875,1375 h70
  text "Released under the CERN OHL v1.2" at 5143,1294.67 h70
  text "FILE PATH:" at 5100,1225 h45
  text ".PCB_FILE_NAME" at 5450,1225 h45
  text "1" at 2351.34,1065 h70
  text "2" at 5102,1065 h70
  text "3" at 7847,1065 h70
  text "4" at 10598.01,1065 h70

## Dimensions
3125,3750 to 5100,3750 on Board Outline
3125,3750 to 3125,5000 on Board Outline